# Altium PCB NEO7M_EVAL.PcbDoc
Units mm, origin at the board's own origin, x right, y up, seen from the top; angles counter-clockwise.
Board outline 38.4 x 22.1 mm, 2 copper layers (Top Layer, Bottom Layer), stack 1.271 mm thick; 16 components, 13 nets, 59 pads, 203 vias.
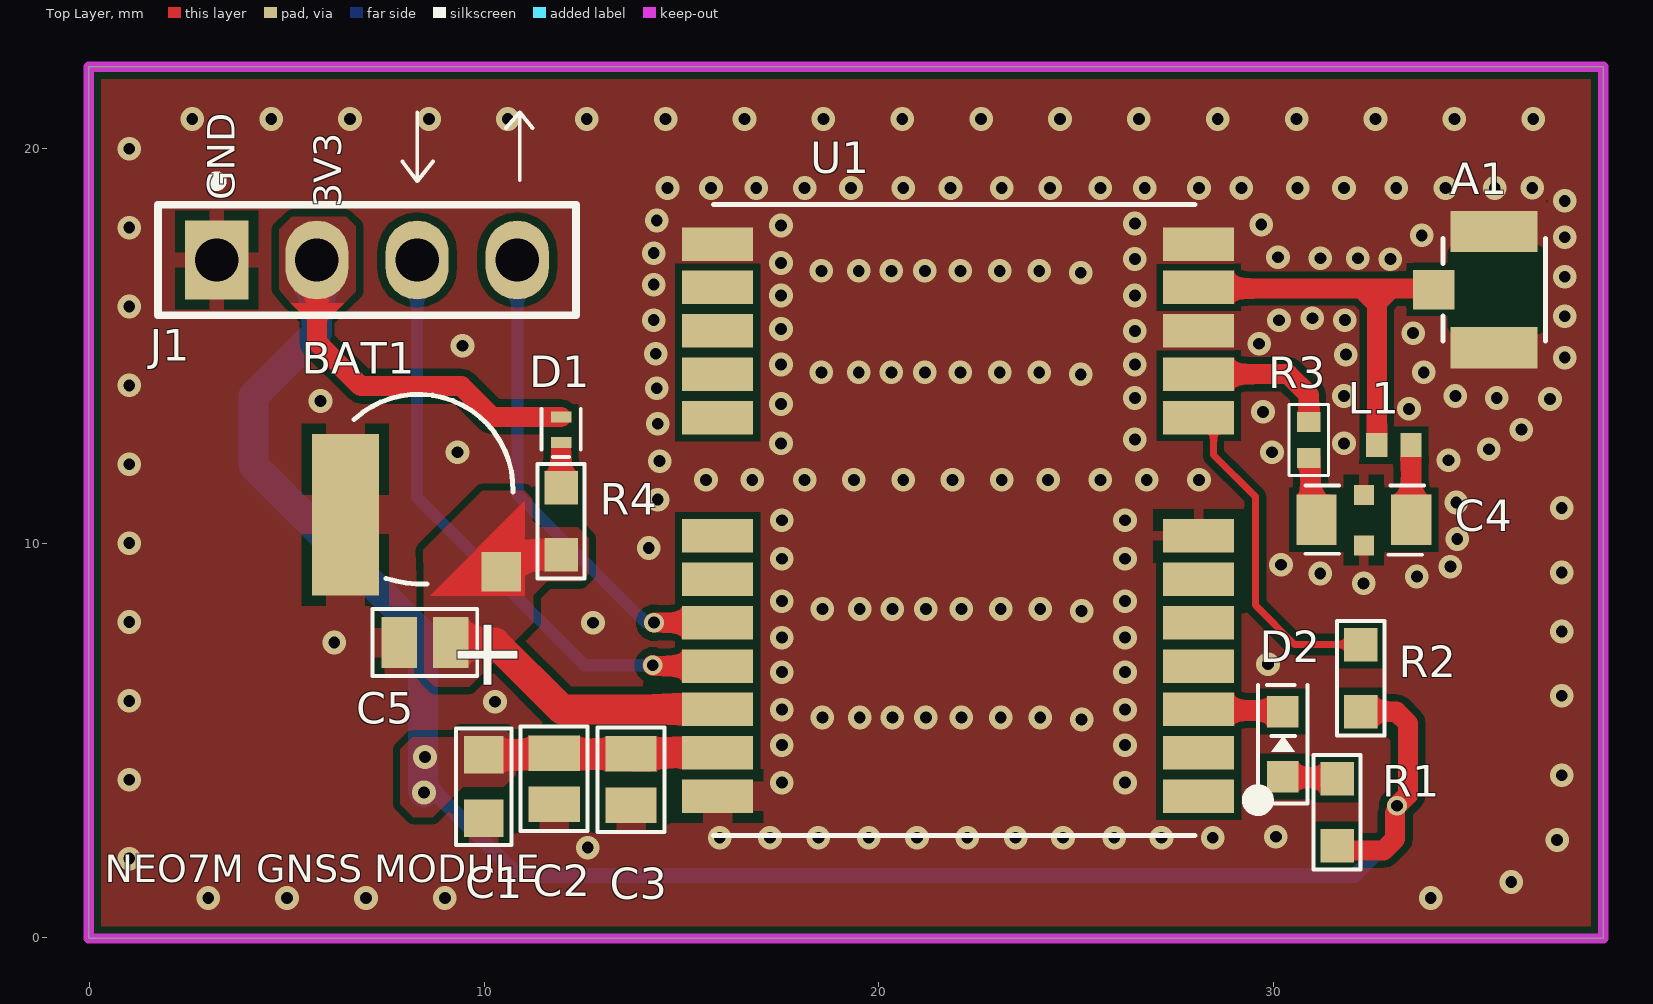
[diagram p0: Top Layer view]
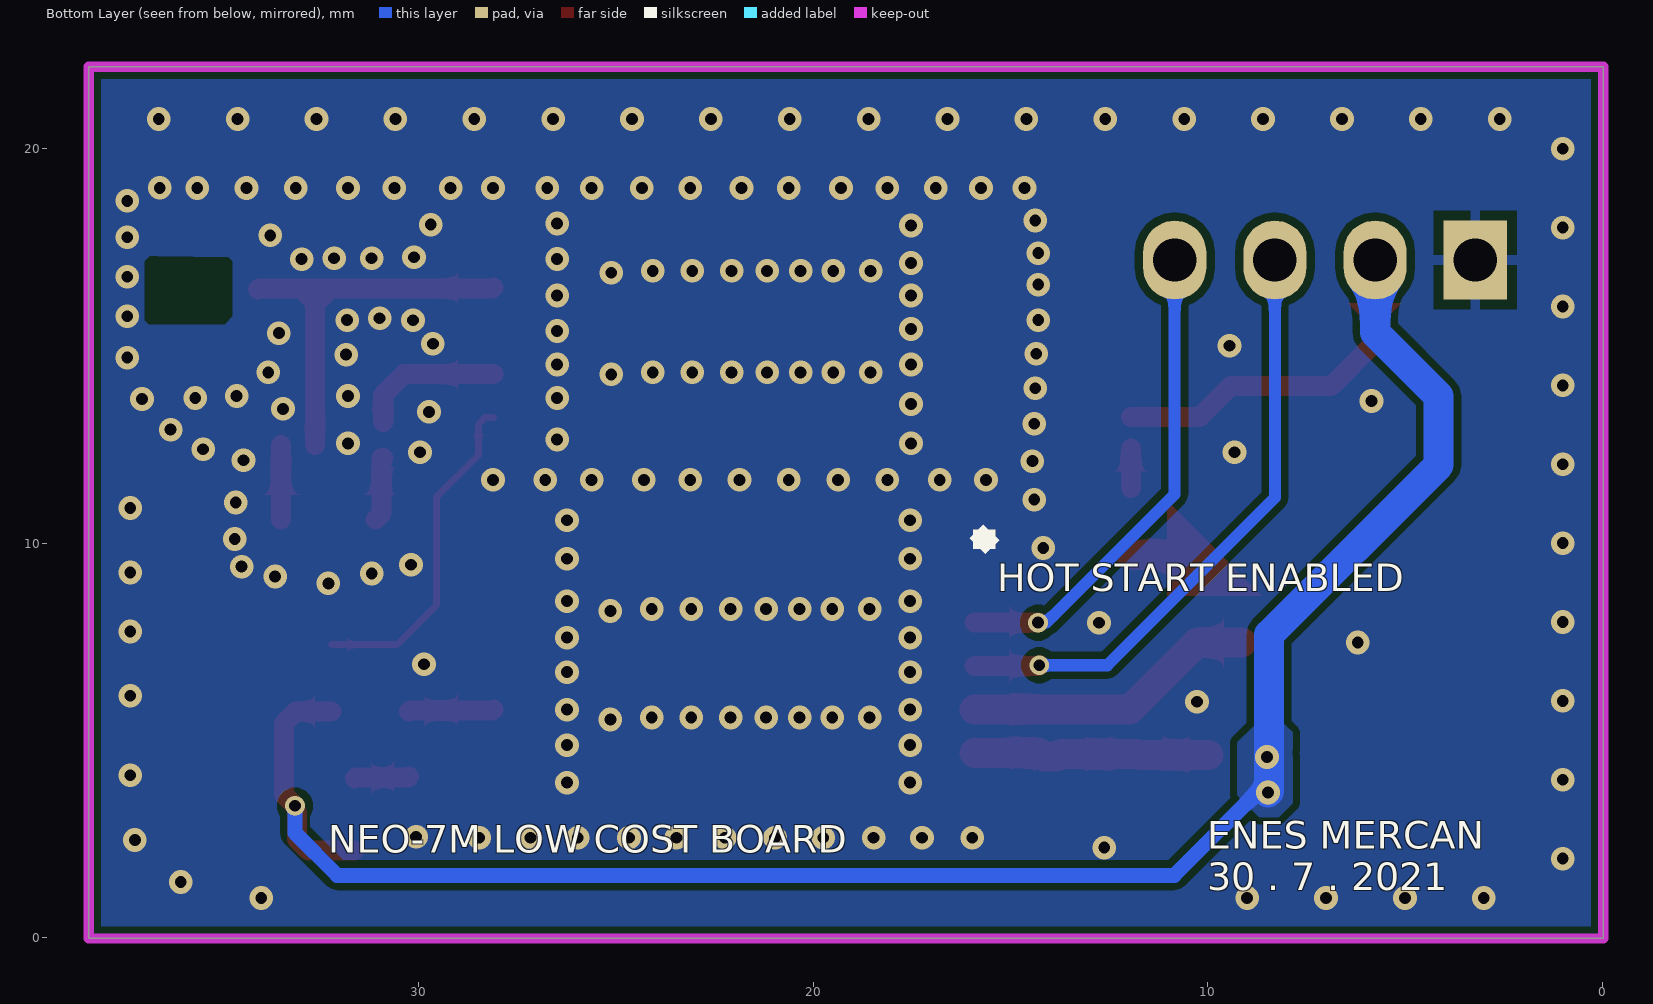
[diagram p1: Bottom Layer view, seen from below]
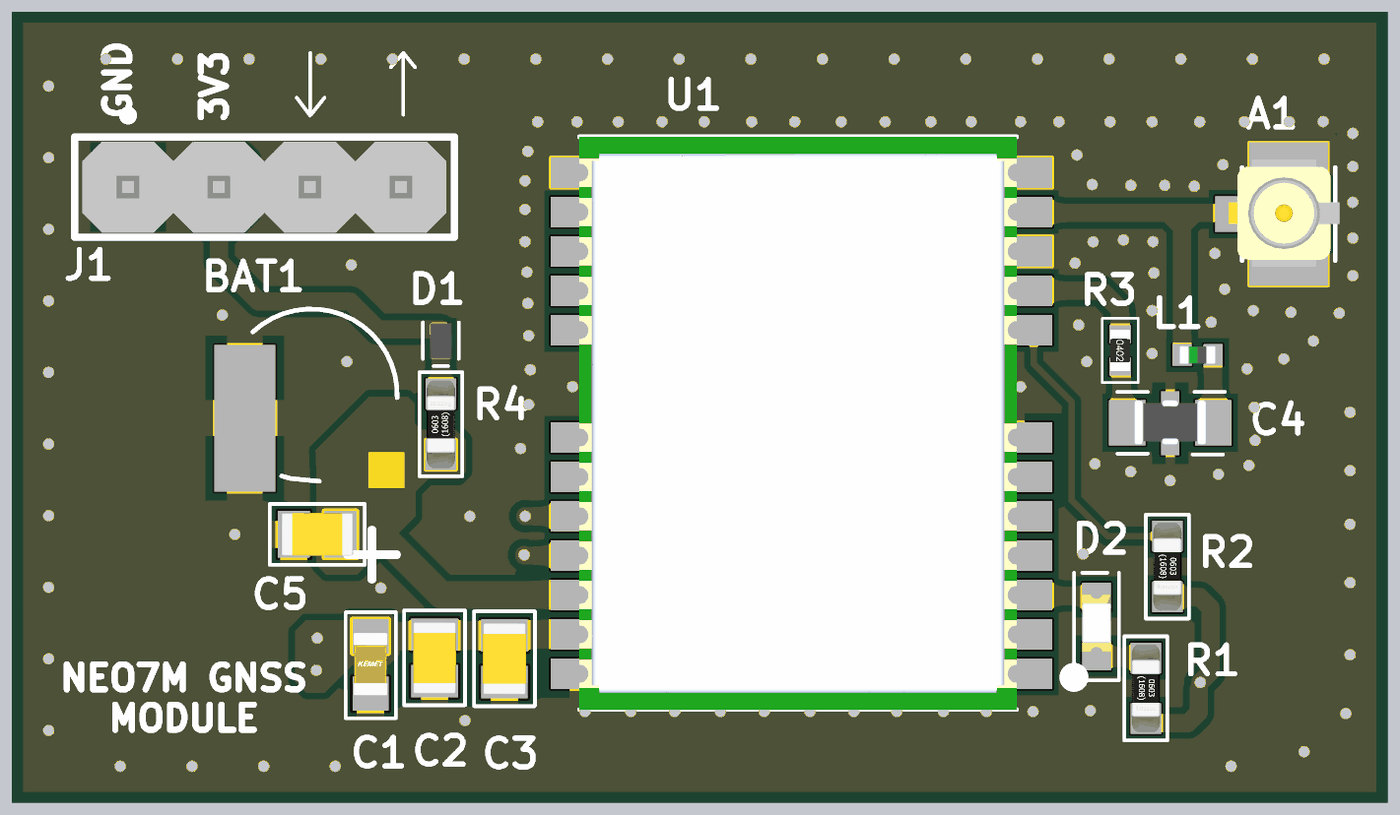
[diagram p2: 3D render of the assembled board from above, using the file's embedded part models]

## Layer stack, top to bottom
Top Solder: solder mask 0.0102, Solder Resist, Dk 4.29
Top Layer: signal copper 0.0356
Dielectric 1: dielectric 1.2, FR-4, Dk 4.8
Bottom Layer: signal copper 0.0356
Bottom Solder: solder mask 0.0102, Solder Resist, Dk 4.29

## Board outline
-0.028,-0.022 -0.028,22.078 38.372,22.078 38.372,-0.022

## Design rules (kind name [scope] priority, off if disabled: settings)
Clearance [All] p1: gap=0.178 ignorepadtopadclearanceinfootprint=TRUE except(0: Arc-Hole Track-Hole SMDPad-Text THPad-Text Via-Text Fill-Text Poly-Text Region-Text Text-Text Text-Hole; 0.203: SMDPad-SMDPad SMDPad-THPad THPad-THPad THPad-Fill THPad-Poly THPad-Region Via-Fill Via-Poly Via-Region; 0.254: Arc-THPad Arc-Text Track-THPad Track-Text SMDPad-Via SMDPad-Hole THPad-Via THPad-Hole Via-Hole Fill-Hole Poly-Hole Region-Hole)
HoleSize [All] p1: absolutevalues=TRUE maxlimit=6.3 minlimit=0.2 maxpercent=80.000 minpercent=20.000
MinimumSolderMaskSliver [All] p1: minsoldermaskwidth=0.05
PolygonConnect [All] p1: connectstyle=Relief reliefconductorwidth=0.254 reliefentries=4 polygonreliefangle="90 Angle" airgapwidth=0.254
RoutingCorners [All] p1: cornerstyle=45-Degree minsetback=2.032 maxsetback=2.032
RoutingVias [All] p1: holewidth=0.3 width=0.5 viastyle="Through Hole" minholewidth=0.2 minwidth=0.4 maxholewidth=0.5 maxwidth=1
SilkToSilkClearance [All] p1: silktosilkclearance=0.1
SilkToSolderMaskClearance [IsPad] p1: minsilkscreentomaskgap=0.1 clearancetoexposedcopper=TRUE
SolderMaskExpansion [All] p1: expansion=0.05 istentingtop=FALSE
UnRoutedNet [All] p1: checkbadconnections=TRUE
Width uFl [InNet('NetA1_SIG')] p1: maxlimit=0.508 minlimit=0.508 preferedwidth=0.508 impedanceprofiledriven=TRUE impedanceprofileid={276FB743-C377-41A1-89D6-CE49B49C985F} impedanceprofilevalue=50.000000 minimp=50.000000 maximp=50.000000 favimp=50.000000
Width [All] p2: maxlimit=2.54 minlimit=0.178 preferedwidth=0.254 minimp=50.000000 maximp=50.000000 favimp=50.000000
24 further rules are at their usual default settings.

## Components (designator, comment, footprint, x,y, rotation, side; value= is the part's Value field where it differs from the comment)
A1 "U.FL-R-SMT-1(10)" HRS_U.FL-R-SMT-1(10) 35.604,16.425 r270 top
BAT1 "ML414H-IV01E" ML414H-IV01E 8.332,11.379 r270 top
C1 "C0603C104K5RAC7082" "CAP CER 0603" 9.984,3.828 r90 top
C2 "CL21B105KOFNFNE" "CAP CER 0805" 11.772,4.028 r90 top
C3 "GRM21BR61E106MA73L" "CAP CER 0805" 13.722,4.003 r90 top
C4 "W2F11A4708AT1A" "CAP FEEDTRU 0805" 32.302,10.581 r0 top
C5 "CL21B105KOFNFNE" "CAP CER 0805" 8.497,7.478 r0 top
D1 "SDM05U40CSP-7" SDM05U40CSP-7 11.947,12.878 r90 top
D2 "APTD1608LSYCK/J3-PF" "LED GR 0603" 30.247,4.903 r270 top
J1 "M20-9730445" HDR_ML_1X4 3.217,17.178 r90 top
L1 "LQG15HS27NJ02D" "IND 0402" 33.064,12.488 r180 top
R1 "RC0603FR-071KL" "RES 0603" 31.622,3.178 r270 top
R2 "RC0603FR-0710KL" "RES 0603" 32.222,6.578 r270 top
R3 "RK73H1ERTTP10R0F" "RES 0402" 30.905,12.615 r270 top
R4 "RC0603FR-073K3L" "RES 0603" 11.947,10.553 r90 top
U1 "NEO-7M-0" NEO-7M-0 22.015,10.583 r180 top

## Footprints (in the part's own frame and the unit in brackets; to place one, negate y for a bottom-side part, rotate by r counter-clockwise, add the part's x,y. Pads: shape width x height; smd on the part's side, far side on the other; paste and mask are expansions set on the pad)
"CAP CER 0603" [mm]
  rect 0.95x1 smd paste+0 mask+0.075: 1(-0.8,0) 2(0.8,0)
  silkscreen extent -1.48,-0.71 1.48,0.7, body extent -0.85,-0.48 0.9,0.48, height 0.96
"CAP CER 0805" [mm]
  rect 0.9x1.3 smd mask+0.075: 1(-0.65,0) 2(0.65,0)
  silkscreen extent -1.33,-0.85 1.33,0.85, body extent -1,-0.6 1,0.6, height 1.46
"CAP FEEDTRU 0805" [mm]
  rect 1.02x1.27 smd paste+0 mask+0.05: 1(-1.2,0.013) 2(1.2,0.013)
  rect 0.51x0.51 smd paste+0 mask+0.05: 3(0,-0.637) 3(0,0.638)
  silkscreen extent -1.48,-0.87 1.53,0.88, body extent -1.01,-0.6 1.01,0.65, height 1.15
HDR_ML_1X4 [mm]
  rect 2x1.6 hole 1.1: 1(0,0)
  oval 2x1.6 hole 1.1: 2(0,-2.54) 3(0,-5.08) 4(0,-7.62)
  silkscreen extent -1.4,-9.11 2.1,1.49, body extent -1.27,-8.89 1.27,1.27, height 9.55
HRS_U.FL-R-SMT-1(10) [mm]
  rect 1.05x2.2 smd mask+0.05: GND(-1.475,0) GND(1.475,0)
  rect 1x1.05 smd mask+0.05: SIG(0,-1.525)
  Top Layer pour cut-out: -0.85,1.025 -0.85,1.225 -0.725,1.35 0.775,1.35 0.875,1.25 0.875,-0.675 0.675,-0.875 -0.725,-0.875 -0.825,-0.775
  Bottom Layer pour cut-out: -0.85,1.025 -0.85,1.225 -0.725,1.35 0.775,1.35 0.875,1.25 0.875,-0.675 0.675,-0.875 -0.725,-0.875 -0.825,-0.775
  silkscreen extent -1.3,-1.3 1.3,1.3, body extent -1.52,-1.68 1.48,1.42, height 1.26
"IND 0402" [mm]
  rect 0.54x0.6 smd mask+0.05: 1(-0.432,0) 2(0.432,0)
  body extent -0.5,-0.25 0.5,0.25, height 0.56
"LED GR 0603" [mm]
  rect 0.8x0.8 smd mask+0.05: 1(-0.825,0) 2(0.825,0)
  silkscreen extent -1.5,-0.63 1.5,0.62, body extent -0.9,-0.4 0.7,0.4, height 0.7
ML414H-IV01E [mm]
  rect 1x1 smd paste-1 mask+0: 1(2.108,2.095)
  rect 4.1x1.7 smd: 2(0.658,-1.855)
  Top Layer region: 2.708,0.295 0.308,2.695 2.708,2.695
  silkscreen extent -2.39,-1.63 2.42,2.39, body extent -2.4,-2.4 2.4,2.4, height 1.4
NEO-7M-0 [mm]
  rect 1.8x0.85 smd: 1(-6.1,7) 2(-6.1,5.9) 3(-6.1,4.8) 4(-6.1,3.7) 5(-6.1,2.6) 6(-6.1,1.5) 7(-6.1,0.4) 8(-6.1,-2.6) 9(-6.1,-3.7) 10(-6.1,-4.8) 11(-6.1,-5.9) 12(-6.1,-7) 13(6.1,-7) 14(6.1,-5.9) 15(6.1,-4.8) 16(6.1,-3.7) 17(6.1,-2.6) 18(6.1,0.4) 19(6.1,1.5) 20(6.1,2.6) 21(6.1,3.7) 22(6.1,4.8) 23(6.1,5.9) 24(6.1,7)
  silkscreen extent -7.8,-8 6.2,8, body extent -6,-8 6.2,8, height 2.61
"RES 0402" [mm]
  rect 0.5x0.6 smd mask+0.05: 1(-0.455,0) 2(0.455,0)
  silkscreen extent -0.9,-0.5 0.9,0.5, body extent -0.57,-0.27 0.57,0.27, height 0.42
"RES 0603" [mm]
  rect 0.85x0.85 smd mask+0.05: 1(-0.85,0) 2(0.85,0)
  silkscreen extent -1.45,-0.6 1.46,0.6, body extent -1.23,-0.4 1.23,0.4, height 0.8
SDM05U40CSP-7 [mm]
  rect 0.28x0.52 smd paste+0 mask+0.05: A(0.325,0) C(-0.325,0)
  silkscreen extent -0.7,-0.5 0.52,0.5, body extent -0.5,-0.3 0.5,0.3, height 0.46

## Part data
A1: "HIROSE(HRS) - U.FL-R-SMT-1(10) - RF COAXIAL, U.FL, STRAIGHT JACK, 50OHM", Dielectric Material=Polymer, Frequency=6GHz, Housing Color=Beige, Insulation Resistance=500MR, Manufacturer=Hirose, Max Operating Temperature=90°C, Min Operating Temperature=-40°C, Package Quantity=2500, Supplier Part Number 1=H11891TR-ND, Body Material=Bronze, Body Plating=Silver, Category="RF / Coaxial Connectors", ComponentLink1Description=https://datasheet.ciiva.com/11762/0900766b8105243f-11762474.pdf?src-supplier=RSComponents, ComponentLink1URL=https://datasheet.ciiva.com/11762/0900766b8105243f-11762474.pdf?src-supplier=RSComponents, ComponentLink2Description=https://datasheet.ciiva.com/7651/91524-7651914.pdf?src-supplier=Element14, ComponentLink2URL=https://datasheet.ciiva.com/7651/91524-7651914.pdf?src-supplier=Element14, ComponentLink3Description=https://datasheet.ciiva.com/7651/91524-7651915.pdf?src-supplier=Element14, ComponentLink3URL=https://datasheet.ciiva.com/7651/91524-7651915.pdf?src-supplier=Element14, Connector Type="Coaxial,Receptacle,Male Pin", Contact Material=Brass,Bronze, Contact Plating=Gold, Depth=3.1mm, Fastening Type=Snap, Gender=Male, Impedance=50R, Lead Free="Lead Free", Length=3mm, Manufacturer Part Number=U.FL-R-SMT-1(10), Max Frequency=6GHz, Mount="Surface Mount,Through Hole,PCB", Orientation=Straight, Packaging="Tape and Reel", Pricing 1="2500=0.62974, 5000=0.60802, 12500=0.56459 (USD)", Radiation Hardening=No, REACH SVHC="No SVHC", RoHS=Yes, Stock 1=24998, Supplier 1=Digi-Key, Termination=Solder, Wire/Cable Type=Coaxial
BAT1: "BATTERY LITHIUM 3V RECHARGE", Manufacturer=Seiko, Package Quantity=1, Supplier Part Number 1=628-ML414H-IV01E, Voltage Rating=3V, Category="Batteries and Accessories", ComponentLink1Description=https://datasheet.ciiva.com/3/ml414h-e-3633.pdf?src-supplier=Digi-Key, ComponentLink1URL=https://datasheet.ciiva.com/3/ml414h-e-3633.pdf?src-supplier=Digi-Key, ComponentLink2Description=https://datasheet.ciiva.com/3/ml414h-e-3634.pdf?src-supplier=Digi-Key, ComponentLink2URL=https://datasheet.ciiva.com/3/ml414h-e-3634.pdf?src-supplier=Digi-Key, Manufacturer Part Number=ML414H-IV01E, Packaging="Tape and Reel", Pricing 1="1=1.82000, 10=1.63000, 50=1.45000, 100=1.27000, 1000=0.96600, 10000=0.81500 (USD)", RoHS=Yes, Stock 1=5581, Supplier 1=Mouser, Termination=SMD/SMT, Weight=0.007
C1: library part "CAP CER 0.1UF 50V 0603", "Cap Cer 0.1uF 50V 0603 10%", Capacitance=100nF, Case/Package=0603, Dielectric=X7R, Dielectric Material=Ceramic, Manufacturer=KEMET, Supplier Part Number 1=399-C0603C104K5RAC7082CT-ND, Tolerance=10%, Voltage Rating (DC)=50V, Category="Ceramic Capacitors", DesignedBy="ENES MERCAN", Manufacturer Part Number=C0603C104K5RAC7082, Pricing 1="1=0.12000, 10=0.08900, 50=0.04840, 100=0.03940, 500=0.02818, 1000=0.02214, 2500=0.02012, 5000=0.01852 (USD)", RoHS=Yes, RoHS Compliant=Yes, Stock 1=44787, Supplier 1=Digi-Key, Weight=0.063
C2 C5: library part "CAP CER 1UF 16V 0805", "CAP CER 1UF 16V X7R 0805", Capacitance=1uF, Case Code (Imperial)=0805, Case Code (Metric)=2012, Dielectric=X7R, Manufacturer=Samsung, Max Operating Temperature=125°C, Min Operating Temperature=-55°C, Package Quantity=1, Supplier Part Number 1=1276-2930-1-ND, Tolerance=10%, Voltage Rating=16V, Case/Package=0805, Category="Ceramic Capacitors", ComponentLink1Description=https://datasheet.ciiva.com/25713/cl21b105kofnfne-25713075.pdf?src-supplier=Digi-Key, ComponentLink1URL=https://datasheet.ciiva.com/25713/cl21b105kofnfne-25713075.pdf?src-supplier=Digi-Key, Construction=Flat, Contact Plating=Tin, Length=0.079inch, Manufacturer Part Number=CL21B105KOFNFNE, Mount="Surface Mount", Packaging="Tape and Reel", Pricing 1="1=0.12000, 10=0.08900, 50=0.04840, 100=0.03940, 500=0.02818, 1000=0.02214 (USD)", RoHS=Yes, RoHS Compliant=Yes, Series=CL, Stock 1=73789, Supplier 1=Digi-Key, Termination=Wraparound, Thickness=0.053inch, Width=0.049inch
C3: library part "CAP CER 10UF 25V 0805", "MURATA - GRM21BR61E106MA73L - SMD Multilayer Ceramic Capacitor, 10 µF, 25 V, 0805 [2012 Metric], ± 20%, X5R, GRM Series", Capacitance=10uF, Case Code (Imperial)=0805, Case Code (Metric)=2012, Dielectric=X5R, Manufacturer=Murata, Max Operating Temperature=85°C, Min Operating Temperature=-55°C, Package Quantity=3000, Resistor Type=Ceramic, Supplier Part Number 1=490-10748-1-ND, Tolerance=20%, Voltage Rating=25V, Case/Package=0805, Category="Ceramic Capacitors", ComponentLink1Description=http://www.farnell.com/datasheets/2079185.pdf?src-supplier=Farnell, ComponentLink1URL=http://www.farnell.com/datasheets/2079185.pdf?src-supplier=Farnell, ComponentLink2Description=http://www.mouser.com/ds/2/281/c02e-2905.pdf?src-supplier=Mouser, ComponentLink2URL=http://www.mouser.com/ds/2/281/c02e-2905.pdf?src-supplier=Mouser, ComponentLink3Description=http://components.arrow.com/part/dataview/0323_03061623?src-supplier=Arrow+Europe, ComponentLink3URL=http://components.arrow.com/part/dataview/0323_03061623?src-supplier=Arrow+Europe, ComponentLink4Description=https://search.murata.co.jp/Ceramy/image/img/A01X/G101/ENG/GRM21BR61E106MA73-01.pdf?src-supplier=Digi-Key, ComponentLink4URL=https://search.murata.co.jp/Ceramy/image/img/A01X/G101/ENG/GRM21BR61E106MA73-01.pdf?src-supplier=Digi-Key, ComponentLink5Description=http://www.farnell.com/datasheets/2079185.pdf?src-supplier=Element14, ComponentLink5URL=http://www.farnell.com/datasheets/2079185.pdf?src-supplier=Element14, Depth=1.25mm, Height=1.25mm, Lead Free="Lead Free", Length=2mm, Manufacturer Part Number=GRM21BR61E106MA73L, Mount="Surface Mount", Packaging="Tape and Reel", Pricing 1="1=0.26000, 10=0.17900, 50=0.11960, 100=0.10170, 500=0.07176, 1000=0.06279 (USD)", REACH SVHC="No SVHC", RoHS=Yes, RoHS Compliant=Yes, Stock 1=318119, Supplier 1=Digi-Key, Termination=SMD/SMT, Thickness=0.055inch, Voltage Rating (DC)=25V, Weight=0.000335oz, Width=0.049inch
C4: library part "CAP FT 47PF 100V 0805", "CAP FEEDTHRU 47PF 100V 0805", Capacitance=47pF, Case Code (Imperial)=0805, Case Code (Metric)=2012, Current=300mA, DC Resistance (DCR)=600mR, Dielectric=C0G, Dielectric Material=Ceramic, Insulation Resistance=1GR, Manufacturer="Kyocera AVX", Max Operating Temperature=125°C, Min Operating Temperature=-55°C, Package Quantity=4000, Supplier Part Number 1=478-12987-1-ND, Tolerance=50%, Voltage=100V, Case/Package=0805, Category="Ceramic Capacitors", ComponentLink1Description=https://datasheet.ciiva.com/1011/w2fw3f-1011555.pdf?src-supplier=Digi-Key, ComponentLink1URL=https://datasheet.ciiva.com/1011/w2fw3f-1011555.pdf?src-supplier=Digi-Key, ComponentLink2Description=https://datasheet.ciiva.com/17490/w2fw3f-17490408.pdf?src-supplier=Avnet+Europe, ComponentLink2URL=https://datasheet.ciiva.com/17490/w2fw3f-17490408.pdf?src-supplier=Avnet+Europe, ComponentLink3Description=https://datasheet.ciiva.com/4932/w2fw3f-4932074.pdf?src-supplier=Mouser, ComponentLink3URL=https://datasheet.ciiva.com/4932/w2fw3f-4932074.pdf?src-supplier=Mouser, ComponentLink4Description=https://datasheet.ciiva.com/11516/w2fw3f-11516952.pdf?src-supplier=Avnet, ComponentLink4URL=https://datasheet.ciiva.com/11516/w2fw3f-11516952.pdf?src-supplier=Avnet, Construction=Flat, Current Rating=300mA, Depth=1.25mm, Height=0.045inch, Lead Free="Lead Free", Length=2.01mm, Manufacturer Part Number=W2F11A4708AT1A, Mount="Surface Mount", Number of Pins=4, Packaging="Tape and Reel", Pricing 1="1=0.46000, 10=0.32200, 50=0.24380, 100=0.21240, 500=0.15730, 1000=0.13370 (USD)", Radiation Hardening=No, RoHS=Yes, RoHS Compliant=Yes, Series=W2F, Stock 1=19900, Supplier 1=Digi-Key, Termination=SMD/SMT, Voltage Rating=100V, Voltage Rating (DC)=100V, Width=0.049inch
D1: library part "Schottky Diode GPS", "DIODE SCHTKY 40V 500MA X3WLB1006", Average Rectified Current=500mA, Capacitance=3.5E-11F, Forward Voltage=460mV, Manufacturer=Diodes, Max Forward Surge Current (Ifsm)=14A, Max Operating Temperature=150°C, Max Repetitive Reverse Voltage (Vrrm)=40V, Max Reverse Current=75uA, Min Operating Temperature=-55°C, Package Quantity=5000, Supplier Part Number 1=SDM05U40CSP-7DIDKR-ND, Category="Rectifier Diodes", ComponentLink1Description=http://www.mouser.com/ds/2/115/SDM05U40CSP-520315.pdf?src-supplier=Mouser, ComponentLink1URL=http://www.mouser.com/ds/2/115/SDM05U40CSP-520315.pdf?src-supplier=Mouser, ComponentLink2Description=https://www.diodes.com/assets/Datasheets/SDM05U40CSP.pdf?src-supplier=Digi-Key, ComponentLink2URL=https://www.diodes.com/assets/Datasheets/SDM05U40CSP.pdf?src-supplier=Digi-Key, Element Configuration=Single, Forward Current=500mA, Manufacturer Part Number=SDM05U40CSP-7, Max Reverse Voltage (DC)=40V, Mount="Surface Mount", Number of Pins=2, Packaging="Tape and Reel", Pricing 1="1=0.41000, 10=0.30800, 100=0.17440, 500=0.11550, 1000=0.08855, 2000=0.07700 (USD)", Reverse Voltage (DC)=40V, RoHS=Yes, RoHS Compliant=Yes, Stock 1=221856, Supplier 1=Digi-Key, Weight=0.4
D2: library part "LED YLW 0603", "LED YELLOW CLEAR 2SMD", Case Code (Imperial)=0603, Case Code (Metric)=1608, Color=Yellow, Forward Voltage=1.85V, Lens Color=Colorless, Manufacturer=Kingbright, Supplier Part Number 1=754-1947-1-ND, Test Current=2mA, Case/Package=0603, Category=LEDs, ComponentLink1Description=http://www.mouser.com/ds/2/216/APTD1608LSYCK-J3-PF-535613.pdf?src-supplier=Mouser, ComponentLink1URL=http://www.mouser.com/ds/2/216/APTD1608LSYCK-J3-PF-535613.pdf?src-supplier=Mouser, ComponentLink2Description=http://www.kingbrightusa.com/images/catalog/SPEC/APTD1608LSYCK-J3-PF.pdf?src-supplier=Digi-Key, ComponentLink2URL=http://www.kingbrightusa.com/images/catalog/SPEC/APTD1608LSYCK-J3-PF.pdf?src-supplier=Digi-Key, Dominant Wavelength=590nm, Height=0.95mm, Length=1.6mm, Lens Transparency=Clear, Luminous Intensity=55mcd, Manufacturer Part Number=APTD1608LSYCK/J3-PF, Mount="Surface Mount", Packaging="Tape and Reel", Pricing 1="1=0.58000, 10=0.38200, 100=0.25300, 1000=0.19532 (USD)", RoHS=Yes, RoHS Compliant=No, Stock 1=32340, Supplier 1=Digi-Key, Viewing Angle=60°, Weight=0.0025, Width=0.8mm
J1: library part HDR_ML_1X4, "Headers & Wire Housings 04 SIL VERTICAL PIN HEADER GOLD HT", Case/Package=SIL, Color=Black, Contact Resistance=25mR, Current Rating=3A, Manufacturer=Harwin, Max Operating Temperature=105°C, Min Operating Temperature=-40°C, Package Quantity=1000, Supplier Part Number 1=952-3273-ND, Voltage Rating=750V, Category="Headers and Wire Housings", ComponentLink1Description=https://datasheet.ciiva.com/16733/m20-973-16733567.pdf?src-supplier=Avnet+Europe, ComponentLink1URL=https://datasheet.ciiva.com/16733/m20-973-16733567.pdf?src-supplier=Avnet+Europe, Connector Type="Male Pin", Contact Material=Brass, Contact Mating Length=0.276inch, Contact Plating=Gold, Contact Type="Male Pin", Depth=2.54mm, Gender=Male, Housing Color=Black, Housing Material=Nylon, Length=10.16mm, Manufacturer Part Number=M20-9730445, Max Current Rating=3A, Mount="Through Hole", Number of Contacts=4, Number of Positions=4, Number of Rows=1, Orientation=Straight, Packaging=Bulk, Pitch=2.54mm, Pricing 1="1=0.25000, 10=0.23900, 100=0.16540, 500=0.13998, 1000=0.11453, 5000=0.10181, 10000=0.09226 (USD)", Radiation Hardening=No, RoHS=Yes, RoHS Compliant=Yes, Series=M20, Stock 1=2723, Supplier 1=Digi-Key, Termination=Solder, Weight=0.244
L1: library part "IND 27nH 0402", "Inductor RF Chip Multi-Layer 27nH 5% 100MHz 8Q-Factor Air 300mA 460mOhm DCR 0402 Paper T/R", Case Code (Imperial)=0402, Case Code (Metric)=1005, Current Rating=300mA, DC Resistance (DCR)=460mR, Inductance=27nH, Inductance Tolerance=5%, Manufacturer=Murata, Max Operating Temperature=125°C, Min Operating Temperature=-55°C, Package Quantity=10000, Self Resonant Frequency=1.7GHz, Supplier Part Number 1=490-2628-6-ND, Test Frequency=100MHz, Case/Package=0402, Category="Fixed Inductors", ComponentLink1Description=https://datasheet.ciiva.com/11799/0900766b80f10809-11799242.pdf?src-supplier=RSComponents, ComponentLink1URL=https://datasheet.ciiva.com/11799/0900766b80f10809-11799242.pdf?src-supplier=RSComponents, ComponentLink2Description=https://datasheet.ciiva.com/1038/l0075s0083lqg15hs-1038145.pdf?src-supplier=Digi-Key, ComponentLink2URL=https://datasheet.ciiva.com/1038/l0075s0083lqg15hs-1038145.pdf?src-supplier=Digi-Key, ComponentLink3Description=https://datasheet.ciiva.com/1038/l0075s0083lqg15hs-1038146.pdf?src-supplier=Digi-Key, ComponentLink3URL=https://datasheet.ciiva.com/1038/l0075s0083lqg15hs-1038146.pdf?src-supplier=Digi-Key, ComponentLink4Description=https://datasheet.ciiva.com/1038/l0075s0083lqg15hs-1038147.pdf?src-supplier=Digi-Key, ComponentLink4URL=https://datasheet.ciiva.com/1038/l0075s0083lqg15hs-1038147.pdf?src-supplier=Digi-Key, ComponentLink5Description=https://datasheet.ciiva.com/3082/l0075s0083lqg15hs-3082179.pdf?src-supplier=Avnet, ComponentLink5URL=https://datasheet.ciiva.com/3082/l0075s0083lqg15hs-3082179.pdf?src-supplier=Avnet, ComponentLink6Description=https://datasheet.ciiva.com/16360/l0075s0083lqg15hs-16360143.pdf?src-supplier=Future+Electronics, ComponentLink6URL=https://datasheet.ciiva.com/16360/l0075s0083lqg15hs-16360143.pdf?src-supplier=Future+Electronics, ComponentLink7Description=https://datasheet.ciiva.com/17247/l0075s0083lqg15hs-17247119.pdf?src-supplier=Avnet+Europe, ComponentLink7URL=https://datasheet.ciiva.com/17247/l0075s0083lqg15hs-17247119.pdf?src-supplier=Avnet+Europe, Core Material=Air, DC Current=300mA, Depth=0.55mm, Height=0.5mm, Height - Seated (Max)=0.022inch, Lead Free="Lead Free", Length=1mm, Manufacturer Part Number=LQG15HS27NJ02D, Max DC Current=300mA, Military Standard=Not, Mount="Surface Mount", Packaging="Tape and Reel", Pricing 1="1=0.10000, 10=0.05500, 25=0.04920, 50=0.04180, 100=0.03690, 250=0.03380, 500=0.03072, 1000=0.02580, 2500=0.02211 (USD)", Q Factor=8, Rated Current-Max=300mA, REACH SVHC="No SVHC", RoHS=Yes, RoHS Compliant=Yes, Series=LQG15HS, Shielding=Unshielded, Stock 1=103641, Supplier 1=Digi-Key, Termination=SMD/SMT, Tolerance=5%, Width=0.02inch
R1: library part "RES 1KR 0603", "RES SMD 1K OHM 1% 1/10W 0603", Case Code (Imperial)=0603, Case Code (Metric)=1608, Manufacturer=Yageo, Max Operating Temperature=155°C, Max Power Dissipation=100mW, Min Operating Temperature=-55°C, Resistance=1kR, Resistance Tolerance=1%, Resistor Type="Thick Film", Supplier Part Number 1=311-1.00KHRCT-ND, Temperature Coefficient=100ppm/°C, Voltage Rating=50V, Case/Package=0603, Category="Chip SMD Resistors", Construction=Rectangular, Contact Plating=Tin,Matte, Depth=0.8mm, Features="Moisture Resistant", Height=0.45mm, Lead Free="Lead Free", Length=1.6mm, Manufacturer Part Number=RC0603FR-071KL, Military Standard=Not, Number of Terminations=2, Packaging="Tape and Reel", Power Rating=100mW, Pricing 1="1=0.10000, 10=0.02400, 100=0.00970, 1000=0.00436, 2500=0.00378 (USD)", Radiation Hardening=No, REACH SVHC="No SVHC", RoHS=Yes, RoHS Compliant=Yes, Series=RC, Size Code=0603, Stock 1=12963545, Supplier 1=Digi-Key, Technology="THICK FILM", Termination=SMD/SMT, Tolerance=1%, Weight=0.016
R2: library part "RES 10K 0603", "Res General Purpose Thick Film 0603 10K Ohm 1% 1/10W ±100ppm/°C Molded SMD Paper T/R", Case Code (Imperial)=0603, Case Code (Metric)=1608, Manufacturer=Yageo, Max Operating Temperature=155°C, Max Power Dissipation=100mW, Min Operating Temperature=-55°C, Resistance=10kR, Resistance Tolerance=1%, Resistor Type="Thick Film", Supplier Part Number 1=311-10.0KHRCT-ND, Temperature Coefficient=100ppm/°C, Voltage Rating=75V, Voltage Rating (DC)=50V, Case/Package=0603, Category="Chip SMD Resistors", ComponentLink1Description=https://datasheet.ciiva.com/7660/38590-7660789.pdf?src-supplier=Element14, ComponentLink1URL=https://datasheet.ciiva.com/7660/38590-7660789.pdf?src-supplier=Element14, ComponentLink2Description=https://datasheet.ciiva.com/7983/443971-7983596.pdf?src-supplier=Element14, ComponentLink2URL=https://datasheet.ciiva.com/7983/443971-7983596.pdf?src-supplier=Element14, ComponentLink3Description=https://datasheet.ciiva.com/22747/443971-22747519.pdf?src-supplier=Element14, ComponentLink3URL=https://datasheet.ciiva.com/22747/443971-22747519.pdf?src-supplier=Element14, ComponentLink4Description=https://datasheet.ciiva.com/46440/1868787-46440891.pdf?src-supplier=Element14, ComponentLink4URL=https://datasheet.ciiva.com/46440/1868787-46440891.pdf?src-supplier=Element14, ComponentLink5Description=https://datasheet.ciiva.com/7746/1738695-7746239.pdf?src-supplier=Element14, ComponentLink5URL=https://datasheet.ciiva.com/7746/1738695-7746239.pdf?src-supplier=Element14, ComponentLink6Description=https://datasheet.ciiva.com/15189/getdatasheetpartid-409289-15189591.pdf?src-supplier=Verical, ComponentLink6URL=https://datasheet.ciiva.com/15189/getdatasheetpartid-409289-15189591.pdf?src-supplier=Verical, Construction=Rectangular, Depth=0.8mm, Features="Moisture Resistant", Height=0.45mm, Lead Free="Lead Free", Lead Pitch=0.3mm, Length=1.6mm, Manufacturer Part Number=RC0603FR-0710KL, Military Standard=Not, Number of Pins=2, Number of Terminations=2, Packaging="Tape and Reel", Power Rating=100mW, Pricing 1="1=0.10000, 10=0.02400, 100=0.00970, 1000=0.00436, 2500=0.00378 (USD)", REACH SVHC=Unknown, RoHS=Yes, RoHS Compliant=Yes, Series=RC, Size Code=0603, Stock 1=17970648, Supplier 1=Digi-Key, Termination=SMD/SMT, Tolerance=1%, Weight=0.002, Width=0.8mm
R3: library part "RES 10R 0402", "Thick Film Resistors - SMD Anti Sulfur 0.5 Tol. 0402 -55oC to 155oC", Case Code (Imperial)=0402, Case Code (Metric)=1005, Manufacturer="KOA Speer", Max Operating Temperature=155°C, Min Operating Temperature=-55°C, Package Quantity=10000, Power Rating=63mW, Resistance=10R, Supplier Part Number 1=2019-RK73H1ERTTP10R0FCT-ND, Temperature Coefficient=100ppm/°C, Tolerance=1%, Voltage Rating=50V, Case/Package=0402, Category="Chip SMD Resistors", ComponentLink1Description=http://www.mouser.com/ds/2/219/RK73H-5715.pdf?src-supplier=Mouser, ComponentLink1URL=http://www.mouser.com/ds/2/219/RK73H-5715.pdf?src-supplier=Mouser, Height=0.35mm, Length=1mm, Manufacturer Part Number=RK73H1ERTTP10R0F, Packaging="Tape and Reel", Pricing 1="1=0.14000, 10=0.12700, 100=0.04890, 1000=0.02150, 2500=0.01857, 5000=0.01662 (USD)", RoHS=Yes, Stock 1=108727, Supplier 1=Digi-Key, Termination=SMD/SMT, Weight=2.3E-05oz, Width=0.5mm
R4: library part "RES 3K3R 0603", "YAGEO - RC0603FR-073K3L - SMD Chip Resistor, 0603 [1608 Metric], 3.3 kohm, RC Series, 75 V, Thick Film, 100 mW", Case Code (Imperial)=0603, Case Code (Metric)=1608, Manufacturer=Yageo, Max Operating Temperature=155°C, Max Power Dissipation=100mW, Min Operating Temperature=-55°C, Package Quantity=1, Resistance=3.3kR, Resistance Tolerance=1%, Resistor Type="Thick Film", Supplier Part Number 1=311-3.30KHRDKR-ND, Temperature Coefficient=100ppm/°C, Voltage Rating=50V, Case/Package=0603, Category="Chip SMD Resistors", Construction=Rectangular, Depth=0.8mm, Features="Moisture Resistant", Height=0.022inch, Lead Free="Lead Free", Length=1.6mm, Manufacturer Part Number=RC0603FR-073K3L, Military Standard=Not, Number of Pins=2, Number of Terminations=2, Packaging="Tape and Reel", Power Rating=100mW, Pricing 1="1=0.10000, 10=0.02400, 100=0.00970, 1000=0.00436, 2500=0.00378 (USD)", REACH SVHC="No SVHC", RoHS=Yes, RoHS Compliant=Yes, Series=RC, Size Code=0603, Stock 1=789417, Supplier 1=Digi-Key, Termination=SMD/SMT, Tolerance=1%, Voltage Rating (DC)=50V, Weight=0.016, Width=0.8mm
U1: "series RF Receiver GLONASS, GNSS, GPS 1.575GHz -161dBm - - -", Case/Package=SMD/SMT, Frequency=1.575GHz, Manufacturer=u-blox, Max Operating Temperature=85°C, Min Operating Temperature=-40°C, Supplier Part Number 1=672-NEO-7M-0CT-ND, Category="RF Receivers, Transceivers", ComponentLink1Description=https://www.u-blox.com/sites/default/files/products/documents/NEO-7_DataSheet_%28UBX-13003830%29.pdf?src-supplier=Digi-Key, ComponentLink1URL=https://www.u-blox.com/sites/default/files/products/documents/NEO-7_DataSheet_%28UBX-13003830%29.pdf?src-supplier=Digi-Key, Interface=I2C,SPI,USB,UART, Manufacturer Part Number=NEO-7M-0, Packaging="Tape and Reel", Pricing 1="1=26.50000, 10=25.70000, 50=21.08000, 100=16.88010 (USD)", RoHS=Yes, Sensitivity=-161dBm, Supplier 1=Digi-Key

## Via types
v1: diameter 0.6, hole 0.3, Top Layer to Bottom Layer, tented both sides, 200 vias
v2: diameter 0.5, hole 0.3, Top Layer to Bottom Layer, tented both sides, 3 vias

## Nets (pads, with @x,y where several pads share a name; then routed paths per layer and width w, separated by ;. In a path a pad name is that pad's centre, name@x,y a point inside that pad or via, vN(x,y) a via of type N, cw(c..) or ccw(c..) an arc to the next point about the centre after c; other vN are vias at no path point)
+3V3: C1.2 C2.2 C3.2 D1.A J1.2 R1.2 R2.2 U1.23 | length 63.4
  Top Layer w0.508: J1.2 5.757,15.093 6.872,13.978 9.422,13.978 10.197,13.203 D1.A ; R1.2@31.651,2.203 32.799,2.203 33.097,2.501 v2@33.097,3.153 ; R2.2 33.124,5.728 33.422,5.431 33.422,3.617 v2(33.144,3.339)
  Top Layer w0.762: C1.2 C2.2@11.722,4.628 ; C2.2@11.797,4.653 C3.2 ; C3.2@13.829,4.586 14.167,4.586 14.264,4.683 U1.23
  Bottom Layer w0.381: 8.447,3.978 10.847,1.578 32.072,1.578 33.144,2.65 v2(33.144,3.339)
  Bottom Layer w0.762: J1.2 5.757,15.338 4.147,13.728 4.147,11.978 8.447,7.678 8.447,3.978 8.447,3.703 v1(8.472,3.678)
  other v1: 8.497,4.578
GND: A1.GND BAT1.2 C1.1 C2.1 C3.1 C4.3 C5.1 J1.1 U1.7 U1.10 U1.12 U1.13 U1.24
  other v1: 3,1 5,1 7,1 9,1 34,1 36.037,1.407 1,2 12.622,2.278 37.202,2.473 15.972,2.528 17.247,2.528 18.472,2.528 19.747,2.528 20.972,2.528 22.247,2.528 23.472,2.528 24.672,2.528 25.972,2.528 27.172,2.528 28.472,2.528 30.072,2.553 17.547,3.928 26.247,3.928 1,4 37.32,4.114 17.547,4.878 26.247,4.878 25.147,5.528 18.572,5.578 19.522,5.578 20.347,5.578 21.197,5.578 22.097,5.578 23.097,5.578 24.097,5.578 17.547,5.778 26.247,5.778 10.272,5.978 1,6 37.32,6.129 17.547,6.728 26.247,6.728 29.872,6.928 6.197,7.478 17.547,7.603 26.247,7.603 37.32,7.761 1,8 12.755,7.983 25.147,8.278 18.572,8.328 19.522,8.328 20.347,8.328 21.197,8.328 22.097,8.328 23.097,8.328 24.097,8.328 17.547,8.528 26.247,8.528 32.297,8.978 33.647,9.153 31.197,9.228 37.32,9.257 34.497,9.403 30.2,9.45 17.547,9.603 26.247,9.603 14.172,9.878 1,10 34.672,10.103 17.547,10.578 26.247,10.578 37.32,10.89 34.647,11.028 14.397,11.103 15.622,11.603 16.797,11.603 18.122,11.603 19.372,11.603 20.622,11.603 21.872,11.603 23.122,11.603 24.297,11.603 25.622,11.603 26.797,11.603 28.122,11.603 1,12 14.447,12.078 34.447,12.103 9.322,12.303 29.972,12.303 35.472,12.378 17.522,12.528 31.797,12.528 26.497,12.628 36.297,12.878 14.397,13.028 29.747,13.328 33.447,13.403 17.522,13.528 5.847,13.603 37.022,13.653 26.497,13.678 35.672,13.678 31.797,13.728 34.622,13.728 14.372,13.928 1,14 25.122,14.278 18.547,14.328 19.497,14.328 20.322,14.328 21.172,14.328 22.072,14.328 23.072,14.328 24.072,14.328 33.822,14.328 17.522,14.528 26.497,14.528 37.397,14.703 31.847,14.778 14.347,14.803 9.447,15.003 29.647,15.053 33.55,15.325 26.497,15.378 17.522,15.428 30.15,15.65 14.297,15.653 31.822,15.653 30.997,15.703 37.397,15.753 1,16 17.522,16.278 26.497,16.278 14.297,16.553 37.397,16.753 25.122,16.853 18.547,16.903 19.497,16.903 20.322,16.903 21.172,16.903 22.072,16.903 23.072,16.903 24.072,16.903 17.522,17.103 32.975,17.2 26.497,17.203 31.2,17.225 32.15,17.225 30.125,17.25 14.297,17.353 37.397,17.753 33.772,17.803 1,18 17.522,18.053 29.7,18.075 26.497,18.103 14.372,18.178 37.397,18.678 14.647,19.003 15.747,19.003 16.897,19.003 18.122,19.003 19.297,19.003 20.622,19.003 21.822,19.003 23.122,19.003 24.347,19.003 25.622,19.003 26.747,19.003 28.122,19.003 29.197,19.003 30.622,19.003 31.797,19.003 33.122,19.003 34.372,19.003 35.622,19.003 36.57,19.008 1,20 2.597,20.754 4.597,20.754 6.597,20.754 8.597,20.754 10.597,20.754 12.597,20.754 14.597,20.754 16.597,20.754 18.597,20.754 20.597,20.754 22.597,20.754 24.597,20.754 26.597,20.754 28.597,20.754 30.597,20.754 32.597,20.754 34.597,20.754 36.597,20.754
NetA1_SIG: A1.SIG L1.2 U1.11 | length 10
  Top Layer w0.508: U1.11 28.144,16.454 32.683,16.454 ; L1.2 32.632,16.403 32.683,16.454 ; A1.SIG 34.05,16.454 32.683,16.454
NetC4_1: C4.1 R3.2 | length 1.7
  Top Layer w0.508: R3.2 30.947,12.16 30.951,12.156 30.951,10.744 C4.1
NetC4_2: C4.2 L1.1 | length 1.9
  Top Layer w0.508: L1.1 33.499,12.485 33.499,10.596 C4.2
NetD1_C: D1.C R4.2 | length 1
  Top Layer w0.508: R4.2 11.947,12.404
NetD2_1: D2.1 U1.3 | length 2.2
  Top Layer w0.508: U1.3 28.142,5.756 30.219,5.756 D2.1
NetD2_2: D2.2 R1.1 | length 1.4
  Top Layer w0.508: D2.2 30.272,4.053 31.597,4.053 R1.1
NetR2_1: R2.1 U1.8 | length 8.6
  Top Layer w0.178: U1.8 28.321,13.183 28.492,13.012 28.492,12.234 29.55,11.176 29.55,8.425 30.547,7.428 R2.1
NetR3_1: R3.1 U1.9 | length 3.7
  Top Layer w0.508: U1.9 30.38,14.283 30.905,13.758 R3.1
RXD: J1.3 U1.21 | length 15.4
  Top Layer w0.508: v2(14.272,6.903) 14.292,6.883 U1.21
  Bottom Layer w0.305: J1.3 8.297,11.153 12.547,6.903 v2(14.272,6.903)
TXD: J1.4 U1.20 | length 12.7
  Top Layer w0.254: J1.4 J1.4@11.047,16.968
  Top Layer w0.508: v2(14.302,7.983) U1.20
  Bottom Layer w0.305: J1.4 10.837,11.238 14.092,7.983 v2(14.302,7.983)
V_BCKP: BAT1.1 C5.2 R4.1 U1.22 | length 9.2
  Top Layer w0.762: C5.2 10.272,7.478 11.967,5.783 U1.22 ; BAT1.1 10.859,9.703 R4.1
pads on no net: U1.1 U1.2 U1.4 U1.5 U1.6 U1.14 U1.15 U1.16 U1.17 U1.18 U1.19

## Polygon pours and split planes (outlines as drawn)
GND on Top Layer "GND_L01_P007" (solid, remove dead copper, pour order 7): -1.1,23.038 41.35,23.038 41.35,-1.037 -0.8,-1.037 -0.8,-0.537
V_BCKP on Top Layer "V_BCKP_L01_P002" (solid, remove dead copper, pour order 2): 8.472,9.153 8.472,6.628 8.747,6.353 9.622,6.353 11.247,7.978 11.247,8.678 11.597,9.028 12.447,9.028 12.647,9.228 12.647,10.128 12.372,10.403 11.397,10.403 11.222,10.578 11.222,11.128 11.022,11.328 9.947,11.328 8.447,9.828
GND on Top Layer "GND_L01_P000" (solid, remove dead copper, pour order 0): 14.195,12.107 13.547,12.755 13.547,18.978 14.182,19.613 35.965,19.613 37.176,18.402 37.176,13.922 35.826,12.107
+3V3 on Top Layer "+3V3_L01_P009" (solid, remove dead copper, pour order 9): 4.797,17.953 5.122,18.278 6.497,18.278 6.747,18.028 6.747,16.378 6.447,16.078 5.094,16.078 4.797,16.428 4.797,16.628
+3V3 on Top Layer "+3V3_L01_P004" (solid, remove dead copper, pour order 4): 7.872,4.778 8.172,5.078 9.247,5.078 9.397,5.228 10.572,5.228 10.797,5.003 10.797,4.128 10.497,3.828 9.472,3.828 8.697,3.053 8.197,3.053 7.872,3.378
GND on Bottom Layer "GND_L02_P006" (solid, remove dead copper, pour order 6): -1.7,23.3 40.75,23.3 40.75,-0.775 -1.4,-0.775 -1.4,-0.275
+3V3 on Bottom Layer "+3V3_L02_P010" (solid, remove dead copper, pour order 10): 8.147,5.503 8.697,5.503 9.247,4.953 9.247,3.603 8.697,3.053 8.197,3.053 7.847,3.403 7.847,5.203

## Keep-outs
Keep-Out Layer:
  the board outline again, w0.254

## Other copper
Top Layer:
  pour cut-out: 12.549,10.801 12.5,10.751 12.5,10.623 12.24,10.883
  region net +3V3: 5.097,16.078 5.622,15.553 5.947,15.553 5.947,15.578 6.447,16.078
  region net NetA1_SIG: 32.048,16.298 32.429,15.917 32.81,15.917 33.191,16.298

## Silkscreen, mask and mechanical layers (free items; w line width, h text height)
Top Overlay:
  lines w0.1: 7.925,19.675 8.3,19.175 ; 8.3,20.925 8.3,19.175 ; 8.7,19.675 8.3,19.175 ; 10.9,19.2 10.9,20.925 ; 11.225,20.525 10.9,20.925 ; 10.9,20.925 10.55,20.525 10.9,20.925
  text "GND" at 3.675,18.692 h0.7 r90
  text "3V3" at 6.375,18.517 h0.7 r90
  text "NEO7M GNSS MODULE" at 0.376,1.4 h0.7
Bottom Overlay:
  region: 15.636,9.72 16.043,10.127 15.689,10.48 15.282,10.073
  rectangle: 15.375,9.85 15.95,10.35
  text "HOT START ENABLED" at 15.331,8.775 h0.7
  text "NEO-7M LOW COST BOARD" at 32.304,2.15 h0.7
  text "ENES MERCAN / 30 . 7 . 2021" at 10.016,1.2 h0.7
Drill Guide:
  the board outline again, w0.1

## Text inside footprints (layer, text, board x,y; h text height)
BAT1: Top Overlay "+" at 9.332,8.179 h1.78 r270